# Altium PCB PowerSupplyPCB.PcbDoc
Units mil, origin at the board's own origin, x right, y up, seen from the top; angles counter-clockwise.
Board outline 6000 x 4000 mil, 2 copper layers (Top Layer, Bottom Layer); 20 components, 14 nets, 62 pads, 2 vias.
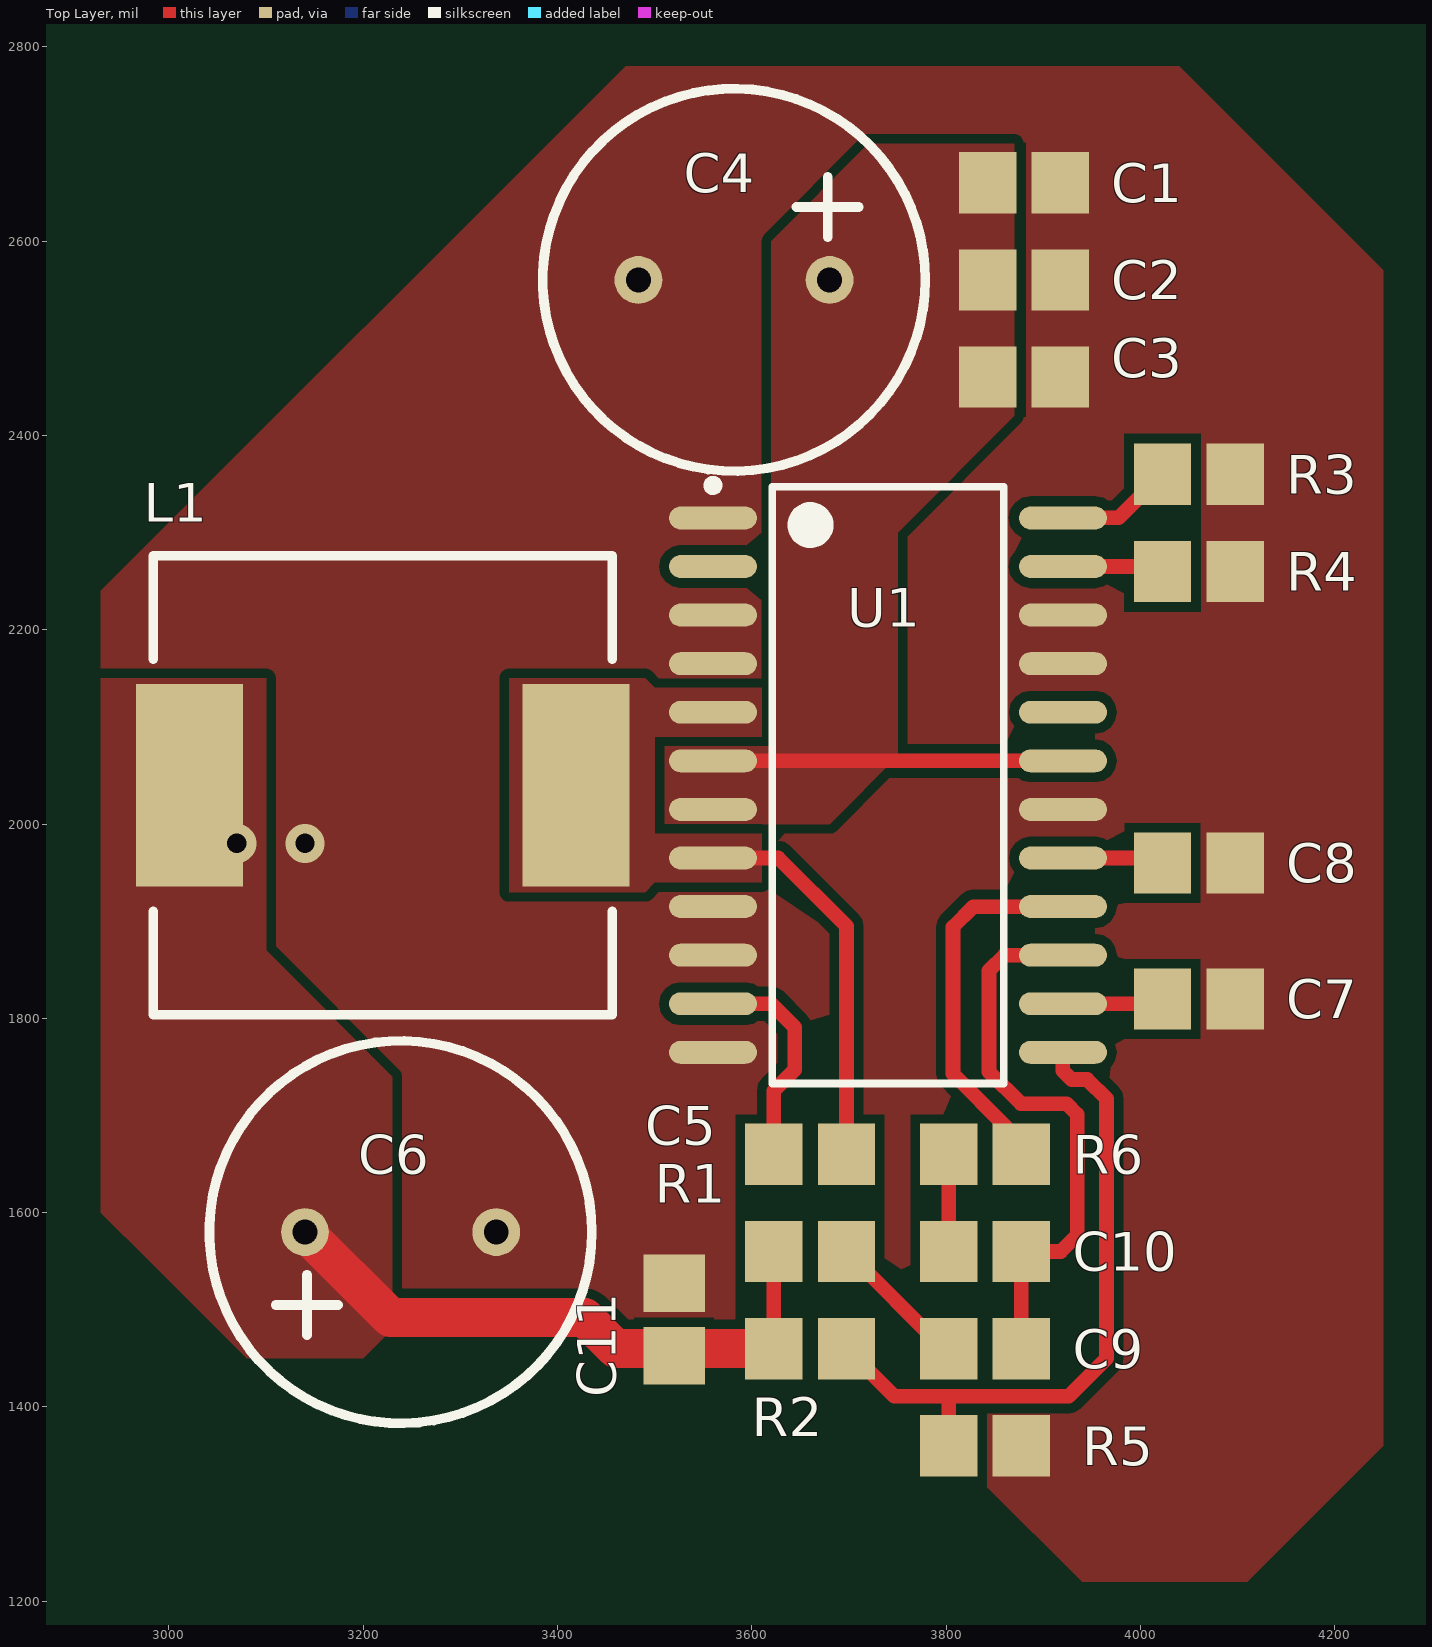
[diagram p0: Top Layer view]
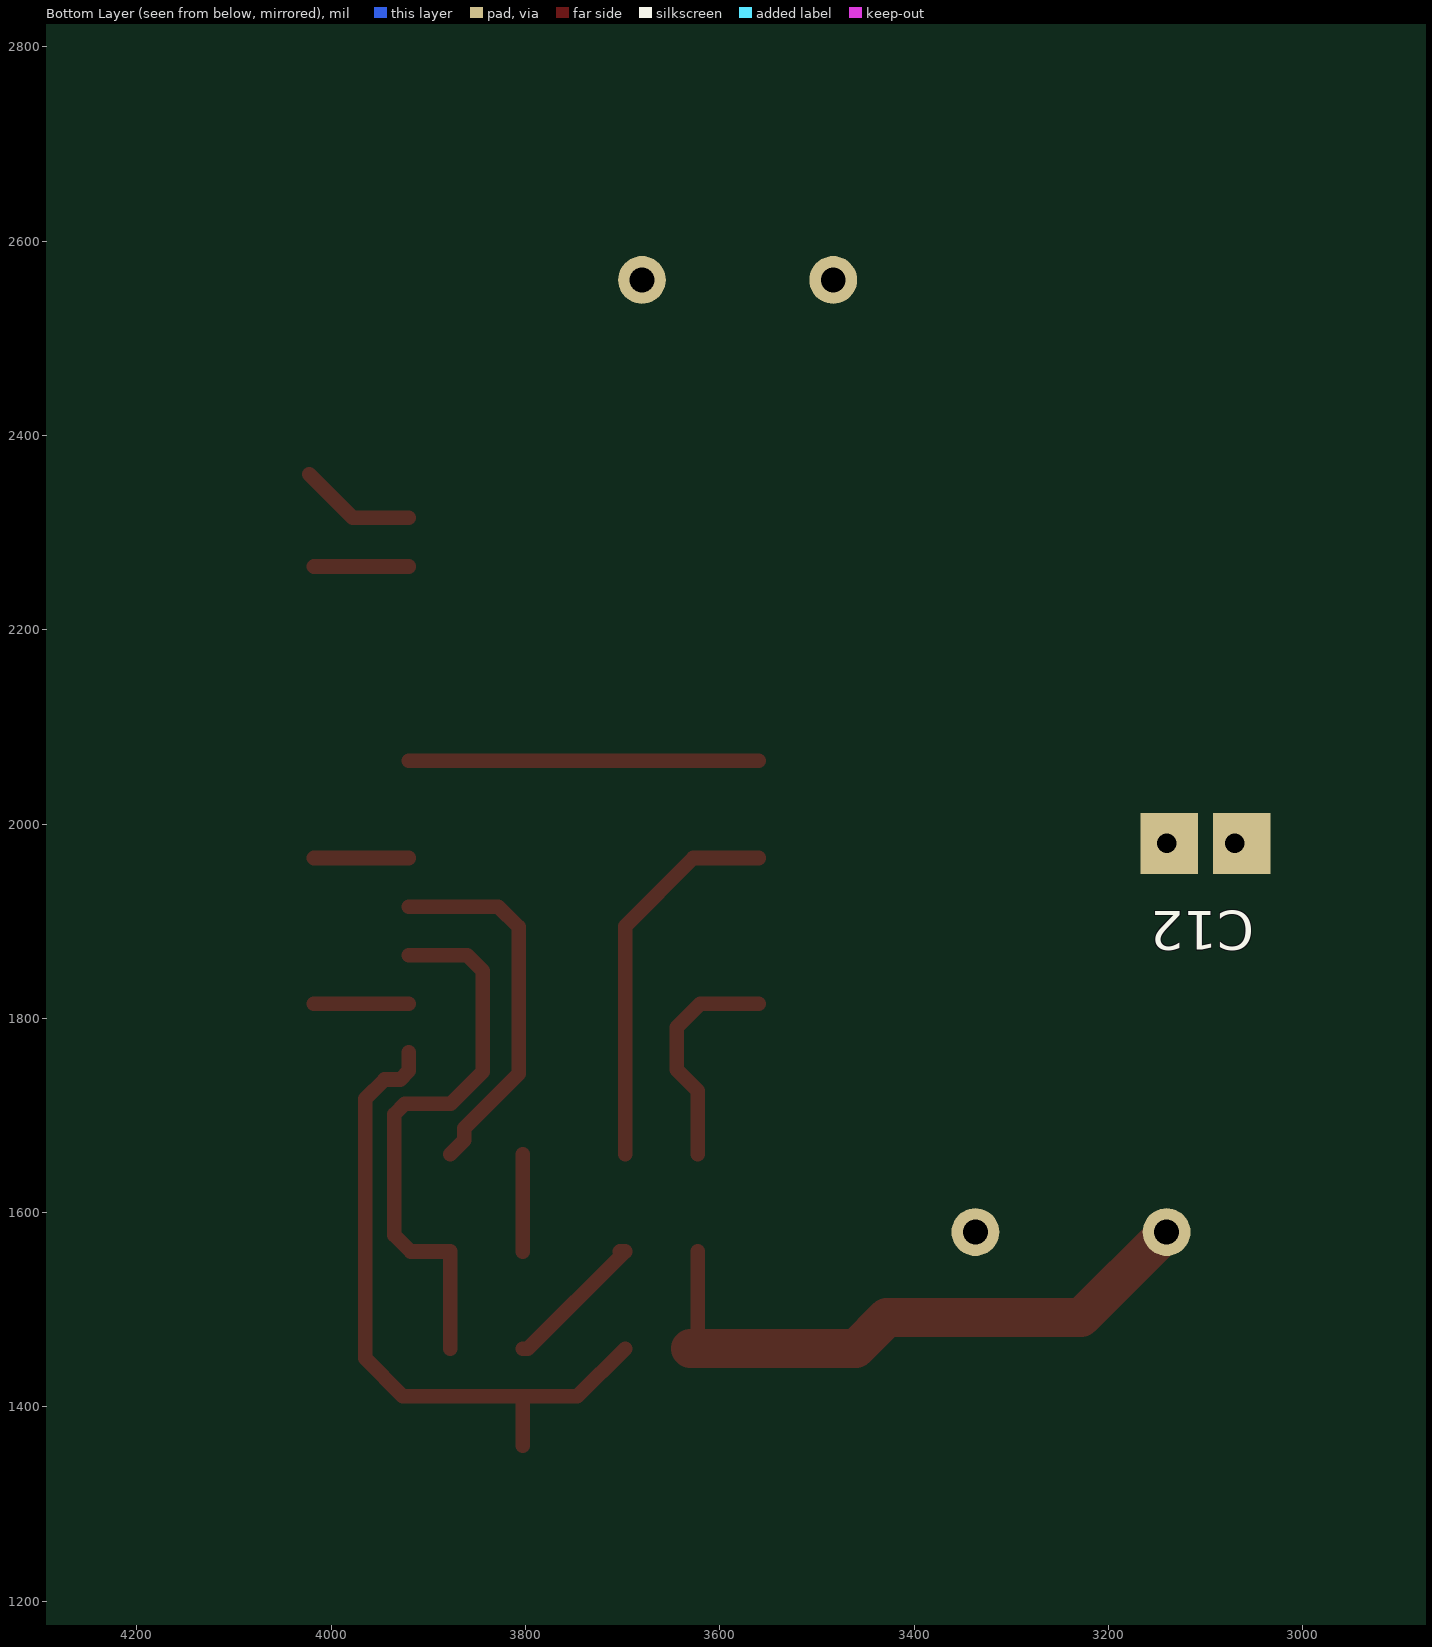
[diagram p1: Bottom Layer view, seen from below]

## Layer stack, top to bottom
Top Layer: signal copper 1.4
Dielectric: dielectric 12.6, FR-4, Dk 4.8
Bottom Layer: signal copper 1.4

## Board outline
1000,1000 7000,1000 7000,5000 1000,5000

## Design rules (kind name [scope] priority, off if disabled: settings)
Clearance [All] p1: gap=10
FabricationTestpoint [(IsPad And (OnTopLayer Or OnBottomLayer))] p1: side=3 testpointundercomponent=TRUE minsize=40 maxsize=100 preferedsize=60 minholesize=0 maxholesize=40 preferedholesize=32 testpointgrid=1 allowsidetop=TRUE allowsidebottom=TRUE usegrid=TRUE gridtolerance=0.01
PolygonConnect PolygonConnect_1 [InNet('+3.3V') or InNet('SW') or InNet('+12P') or InNet('AGND')] p1: connectstyle=Direct reliefconductorwidth=10 reliefentries=4 polygonreliefangle="90 Angle"
PolygonConnect [All] p2: connectstyle=Relief reliefconductorwidth=25 reliefentries=4 polygonreliefangle="90 Angle"
RoutingVias [All] p1: holewidth=15 width=40 viastyle="Through Hole" minholewidth=15 minwidth=30 maxholewidth=50 maxwidth=100
SilkscreenOverComponentPads [All] p1: minsilkscreentomaskgap=10
SolderMaskExpansion [All] p1: expansion=2
Width [All] p1: maxlimit=100 minlimit=10 preferedwidth=10
26 further rules are at their usual default settings.

## Components (designator, comment, footprint, x,y, rotation, side; value= is the part's Value field where it differs from the comment)
C1 "CAP 0.1uF" 0805 3880,2660 r0 top
C2 "CAP 0.1uF" 0805 3880,2560 r0 top
C3 "CAP 0.1uF" 0805 3880,2460 r0 top
C4 "CAP POLY 150UF" CAP_NICHICON_R7 3680,2560 r180 top
C5 "CAP 0.1uF" 0805 3660,1660 r0 top
C6 "CAP POLY 680UF" CAP_NICHICON_R7 3140,1580 r0 top
C7 "CAP 0.2uF" 0805 4060,1820 r0 top
C8 "CAP 10000pF" 0805 4060,1960 r0 top
C9 "CAP 10000pF" 0805 3840,1460 r0 top
C10 "CAP 8200 PF" 0805 3840,1560 r180 top
C11 "CAP 0.1uF" 0805 3520,1490 r90 top
C12 "CAP 0.1uF" 0805 3100,1980 r0 bottom
L1 "L_33uH_20%" L_SRR1210 3220,2040 r270 top
R1 "R_0805_2K_1%" 0805 3660,1560 r0 top
R2 "R_0805_41.2K_1%" 0805 3660,1460 r0 top
R3 "R_0805_39K_1%" 0805 4060,2360 r0 top
R4 "R_0805_130K_1%" 0805 4060,2260 r0 top
R5 "R_0805_24.9k_1%" 0805 3840,1360 r0 top
R6 "R_0805_23.2K_1%" 0805 3840,1660 r0 top
U1 "LM2650 DC/DC Converter" SOIC127P1030X265-24N 3740,2040 r0 top

## Footprints (in the part's own frame and the unit in brackets; to place one, negate y for a bottom-side part, rotate by r counter-clockwise, add the part's x,y. Pads: shape width x height; smd on the part's side, far side on the other; paste and mask are expansions set on the pad)
0805 [mm] "0805 Resistor/Capacitor"
  rect 1.5x1.6 smd: 1(-0.95,0) 2(0.95,0)
  body extent -1.1,-0.72 1.1,0.72, height 1.1
CAP_NICHICON_R7 [mm]
  round 1.25 hole 0.65: 1(0,0) 2(5,0)
  silkscreen extent -2.5,-5 7.5,5
L_SRR1210 [mm]
  rect 5.3x2.8 smd: 1(0,5.05) 2(0,-5.05)
  silkscreen extent -6,-6 6,6
SOIC127P1030X265-24N [mm] "SOIC, 24-Leads, Body 15.6x7.6mm (max), Pitch 1.27mm, IPC Medium Density"
  oval 2.3x0.6 smd: 1(-4.575,6.985) 2(-4.575,5.715) 3(-4.575,4.445) 4(-4.575,3.175) 5(-4.575,1.905) 6(-4.575,0.635) 7(-4.575,-0.635) 8(-4.575,-1.905) 9(-4.575,-3.175) 10(-4.575,-4.445) 11(-4.575,-5.715) 12(-4.575,-6.985) 13(4.575,-6.985) 14(4.575,-5.715) 15(4.575,-4.445) 16(4.575,-3.175) 17(4.575,-1.905) 18(4.575,-0.635) 19(4.575,0.635) 20(4.575,1.905) 21(4.575,3.175) 22(4.575,4.445) 23(4.575,5.715) 24(4.575,6.985)
  silkscreen extent -4.7,-7.8 3.03,7.96, body extent -3.8,-7.8 3.8,7.8, height 2.65

## Part data
C1 C2 C3 C5: library part C_0805_0.1uF_1, "CAP CERM 0.1uF"
C4: library part C_POLY_150UF, "CAP POLY 150UF 20V HT 125C RAD"
C6: library part C_POLY_680UF_10V, "CAP POLY 680UF 10V LOW ESR RAD"
C7: library part C_0805_0.2uF, "CAP CERM 0.2uF"
C8 C9: library part C_0805_10000pF, "CAP CERM 10000PF"
C10: library part C_0805_8200PF_100V, "CAP CERM 8200 PF"
C11 C12: library part C_0805_0.1uF, "CAP CERM 0.1uF"
L1: "INDUCTOR PWR 33UH 20% SHIELD SMD"
R1: library part R_0805_2K_1%_2K, "RES 2K OHM 1/8W 1% 0805 SMD"
R2: "RES 41.2K OHM 1/8W 1% 0805 SMD"
R3: library part R_0805_39K_1%_5, "RES 39K OHM 1/8W 1% 0805 SMD"
R4: "RES 130K OHM 1/8W 1% 0805 SMD"
R5: "RES 24.9K OHM 1/8W 1% 0805 SMD"
R6: "RES 23.2K OHM 1/8W 1% 0805 SMD"
U1: library part U_LM2650, "IC CONVERTER SYNCH DC/DC 24-SOIC"

## Via types
v1: diameter 40, hole 20, Top Layer to Bottom Layer, 2 vias

## Nets (pads, with @x,y where several pads share a name; then routed paths per layer and width w, separated by ;. In a path a pad name is that pad's centre, name@x,y a point inside that pad or via, vN(x,y) a via of type N, cw(c..) or ccw(c..) an arc to the next point about the centre after c; other vN are vias at no path point)
+12P: C1.1 C2.1 C3.1 C4.1 U1.6 U1.7 U1.19 | length 360.2
  Top Layer w15: U1.6 U1.19
AGND: C1.2 C2.2 C3.2 C4.2 C6.2 C7.2 C8.2 C11.2 C12.2 R3.2 R4.2 R5.2 U1.1 U1.3 U1.4 U1.9 U1.10 U1.12 U1.18 U1.21 U1.22
  other v1: 3140,1980
BOOT: C5.1 U1.11 | length 233.9
  Top Layer w15: U1.11 3620,1815 3644,1791 3644,1747 3622.6,1725.6 C5.1
COMP: C9.2 C10.1 U1.15 | length 584.6
  Top Layer w15: C9.2 C10.1 3918,1560 3935,1577 3935,1701 3924,1712 3877,1712 3844,1745 3844,1849 3860,1865 U1.15
"EA OUT": R6.2 U1.16 | length 385
  Top Layer w15: R6.2 3863,1674.4 3863,1687 3807,1743 3807,1894 3828,1915 U1.16
FB: R2.2 R5.1 U1.13 | length 695.4
  Top Layer w15: R2.2 3746.4,1411 3926,1411 3965,1450 3965,1717 3945,1737 3929,1737 3920.12,1745.88 U1.13 ; R5.1 3802.6,1408.41
NetC6_1: C6.1 C11.1 C12.1 L1.2 R1.1 R2.1 | length 639.7
  Top Layer w15: R2.1 R1.1
  Top Layer w40: C6.1 3228,1492 3428,1492 3460,1460 R2.1@3630,1460
  other v1: 3070,1980
NetC9_1: C9.1 R1.2 | length 151.8
  Top Layer w15: R1.2@3702.6,1560 R1.2 3797.4,1460 C9.1
NetC10_2: C10.2 R6.1 | length 100
  Top Layer w15: C10.2 R6.1
SIA: R3.1 U1.24 | length 121.1
  Top Layer w15: U1.24 3977.6,2315 R3.1
SOA: R4.1 U1.23 | length 97.5
  Top Layer w15: U1.23 R4.1@4017.6,2265
SS: C8.1 U1.17 | length 97.5
  Top Layer w15: U1.17 C8.1@4017.6,1965
SW: C5.2 L1.1 U1.5 U1.8 | length 401.3
  Top Layer w15: U1.8 3627,1965 3697.4,1894.6 C5.2
VDD: C7.1 U1.14 | length 97.5
  Top Layer w15: U1.14 C7.1@4017.6,1815
pads on no net: U1.2 U1.20

## Polygon pours and split planes (outlines as drawn)
AGND on Top Layer "PHASEC3" (solid, remove dead copper, pour order 1002): 2930,2240 3470,2780 4040,2780 4250,2570 4250,1360 4110,1220 3940,1220 3680,1480 3070,1480 2930,1620
NetC6_1 on Top Layer "PHASEC3" (solid, remove dead copper, pour order 1000): 2950,2150 3100,2150 3100,1870 3230,1740 3230,1480 3200,1450 3080,1450 2980,1550 2930,1600 2930,2150
SW on Top Layer "PHASEC3" (solid, remove dead copper, pour order 1001): 3350,2150 3490,2150 3500,2140 3610,2140 3610,2090 3500,2090 3500,1990 3610,1990 3610,1940 3500,1940 3490,1930 3350,1930
+12P on Top Layer "PHASEC3" (solid, remove dead copper, pour order 1003): 3510,2080 3620,2080 3620,2600 3720,2700 3870,2700 3870,2420 3750,2300 3750,2070 3680,2000 3510,2000